# EAGLE board PCB_5.0___2024_v51 (EAGLE 9.7.0)
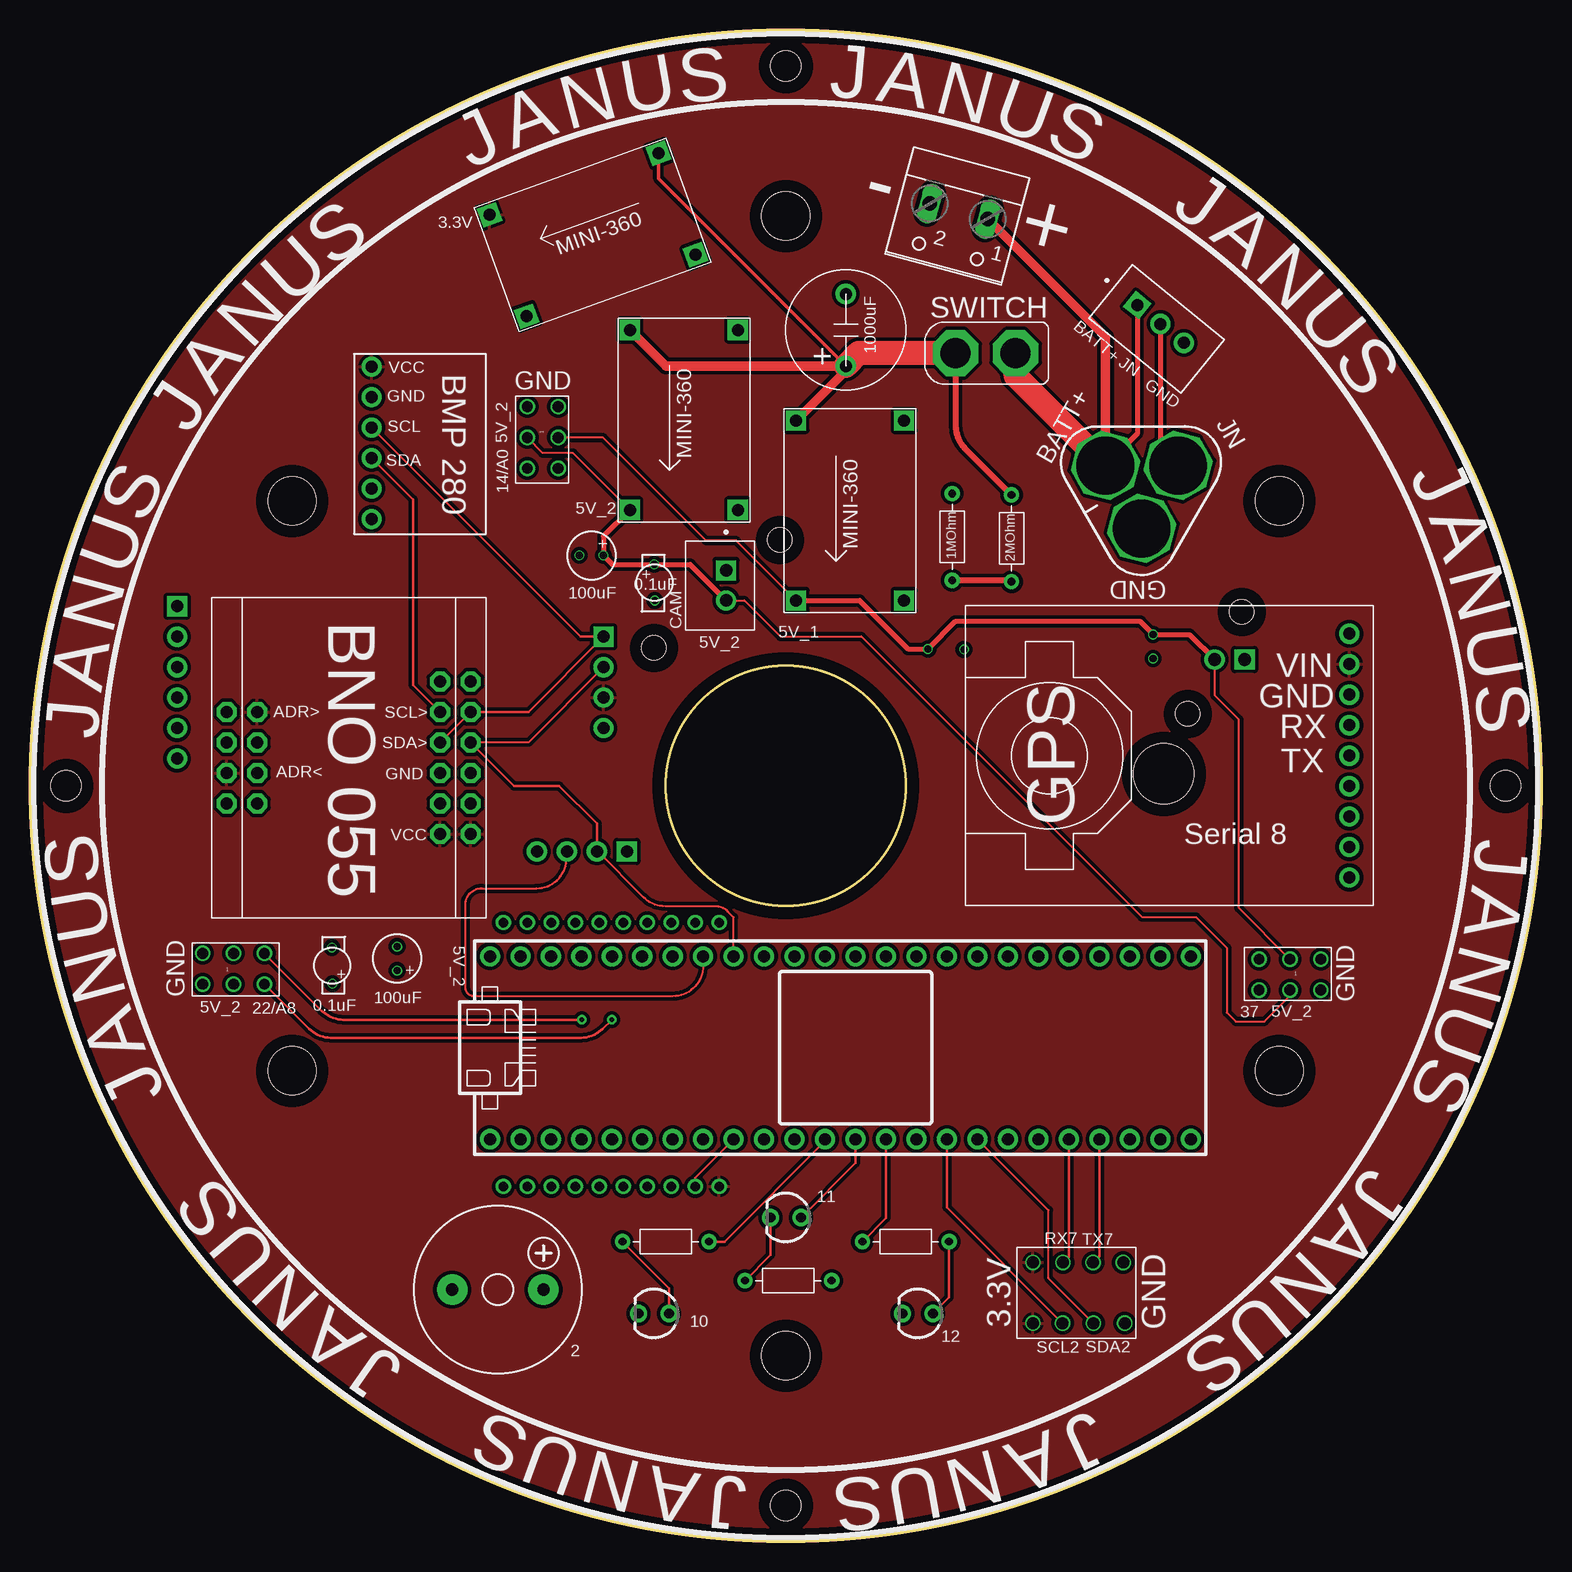
[diagram p0: board, top side]
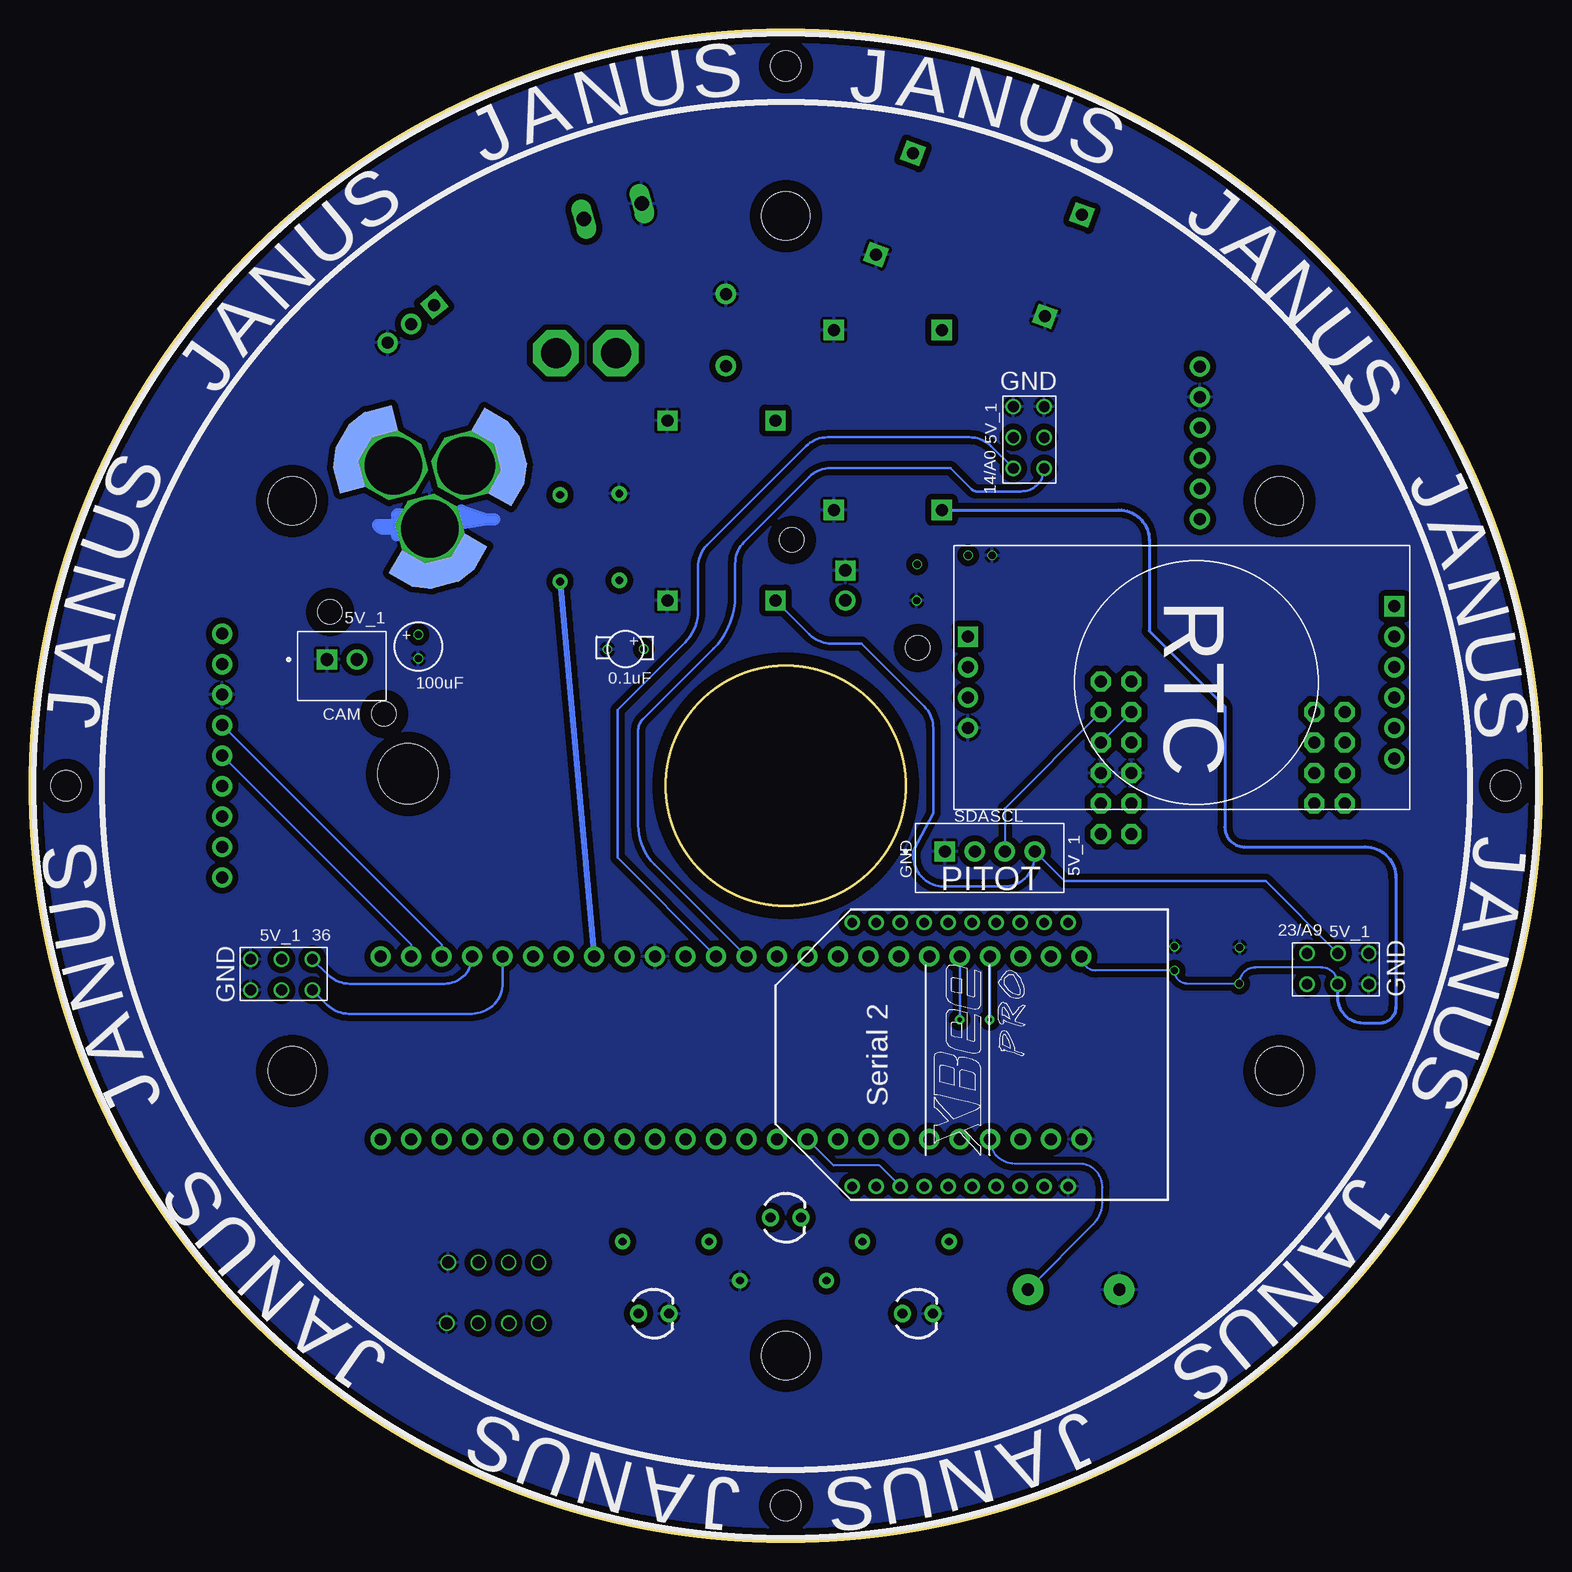
[diagram p1: board, bottom side, seen from below]

Size 126 x 126 mm. Coordinates in mm from the lower left corner, seen from the top.
Outline: circle at 63,63 radius 63
Outline: circle at 63,63 radius 10
Copper layers (1*16): Top 0.035mm / dielectric 1.5mm / Bottom 0.035mm
Design rules "default *": minimum track width 0.15mm, minimum drill 0.35mm, track to track 0.15mm, track to pad 0.15mm, pad to pad 0.15mm, via to via 0.15mm, smd to smd 0.15mm, copper to edge 1mm, drill to drill 0.2mm, minimum pad ring 0.1mm, minimum via ring 8mil, stop-mask expansion 0mil, vias tented up to drill 0mil, thermal gap 10mil
Holes 2.5 mm at 123,63 63,3 3,63 63,123
Holes 4 mm at 104.14,86.75 21.86,39.25 104.14,39.25 21.86,86.75 63,110.5 63,15.5
Holes 2 mm at 101,77.5 96.5,69 62.5,83.5 52,74.5

## Footprints (pad centres in the part's own frame; a part is rotated, then mirrored left to right if it is on the bottom)
JST_B3B-XH-A(LF)(SN) = drill 1 pad 1.676 square: 1 2.5,-0.525 | drill 1 pad 1.676: 2 0,-0.525; 3 -2.5,-0.525
MT-60 = drill 4.8 pad 5.4 octagon: + -3.031,-1.75; - 3.031,-1.75; CM 0,3.5 | smd 2.23 x 2.23 bottom: P$1 6.832,-1.763; P$2 3.032,-5.533; P$6 -3.077,-5.577; P$7 -6.847,-1.778; P$13 -0.024,7.288 | smd 2.23 x 2.23 rotated 45 bottom: P$3 5.702,-4.42 | smd 1.7 x 2.5 rotated 22.5 bottom: P$4 4.441,-5.178 | smd 1.7 x 2.5 rotated 67.5 bottom: P$5 6.469,-3.169 | smd 2.23 x 2.23 rotated 315 bottom: P$8 -5.734,-4.447 | smd 1.7 x 2.5 rotated 292.5 bottom: P$9 -6.492,-3.187 | smd 1.7 x 2.5 rotated 337.5 bottom: P$10 -4.483,-5.215 | smd 2.23 x 2.23 rotated 135 bottom: P$11 -2.691,6.147; P$12 2.651,6.188 | smd 1.7 x 2.5 rotated 157.5 bottom: P$14 1.403,6.933 | smd 1.7 x 2.5 rotated 202.5 bottom: P$15 -1.451,6.946
LED_3MM = drill 0.813 pad 1.422: A -1.27,0; K 1.27,0
JST_B2B-XH-A(LF)(SN) = drill 1.05 pad 1.676 square: 1 1.25,-0.525 | drill 1.05 pad 1.676: 2 -1.25,-0.525
TEENSY4.1 = drill 1 pad 1.676: 0/RX -26.67,-7.62; 1/TX -24.13,-7.62; 2 -21.59,-7.62; 3 -19.05,-7.62; 3V3 6.35,-7.62; 3V3_LO -24.13,7.62; 4 -16.51,-7.62; 5 -13.97,-7.62; 6 -11.43,-7.62; 7 -8.89,-7.62; 8 -6.35,-7.62; 9 -3.81,-7.62; 10/CS -1.27,-7.62; 11/MOSI 1.27,-7.62; 12/MISO 3.81,-7.62; 13/SCK 3.81,7.62; 14/A0 1.27,7.62; 15/A1 -1.27,7.62; 16/A2 -3.81,7.62; 17/A3 -6.35,7.62; 18/A4/SDA -8.89,7.62; 19/A5/SCL -11.43,7.62; 20/A6 -13.97,7.62; 21/A7 -16.51,7.62; 22/A8 -19.05,7.62; 23/A9 -21.59,7.62; 24 8.89,-7.62; 25 11.43,-7.62; 26 13.97,-7.62; 27 16.51,-7.62; 28 19.05,-7.62; 29 21.59,-7.62; 30 24.13,-7.62; 31/A12 26.67,-7.62; 32 29.21,-7.62; 33 29.21,7.62; 34 26.67,7.62; 35 24.13,7.62; 36 21.59,7.62; 37 19.05,7.62; 38 16.51,7.62; 39 13.97,7.62; 40 11.43,7.62; 41 8.89,7.62; AGND -26.67,7.62; GND -29.21,-7.62; GND1 6.35,7.62; VIN -29.21,7.62
JST_B4B-XH-A(LF)(SN) = drill 1 pad 1.676 square: 1 3.75,-0.525 | drill 1 pad 1.676: 2 1.25,-0.525; 3 -1.25,-0.525; 4 -3.75,-0.525
RESAD724W46L381D178B = drill 0.66 pad 1.26: 1 -3.62,0; 2 3.62,0
F/CM12P = drill 1.016 pad 2.54: + 3.81,0; - -3.81,0
XT-30U = drill 2.5 pad 3.81 octagon: + 2.13,2.6; - 7.13,2.6
1000UF = drill 1 pad 1.676: + -3,0; - 3,0
ADAFRUIT_ULTIMATE_GPS = drill 1 pad 1.7: 3.3V 2.019,22.646; EN 2.019,20.106; FIX 2.019,15.026; GND 2.019,7.406; PPS 2.019,2.326; RX 2.019,9.946; TX 2.019,12.486; VBAT 2.019,17.566; VIN 2.019,4.866 | hole 5: 17.5,14
VARY_BUCK = drill 1 pad 1.676 square: IN+ 1,1; IN- 1,10; OUT+ 16,1; OUT- 16,10
BNO055_SELF = drill 1 pad 1.676: CSB 3.779,9.526; GND 11.399,9.526; SCL 8.859,9.526; SD0 1.239,9.526; SDA 6.319,9.526; VCC 13.939,9.526
DS3231_RTC = drill 1 pad 1.676: P$1 1.195,11.879; P$2 1.195,9.339; P$3 1.195,6.799; P$5 36.755,9.339; P$6 36.755,6.799; P$7 36.755,4.259; P$8 36.755,11.879; P$9 36.755,14.419 | drill 1 pad 1.676 square: P$4 1.195,14.419; P$10 36.755,16.959
BNO055 = drill 1 pad 1.676 octagon: 3V 9.525,1.27; 3V1 9.525,3.81; ADR 17.145,19.05; ADR2 12.065,21.59; GND 12.065,1.27; GND1 12.065,3.81; INT 14.605,19.05; INT1 9.525,21.59; PS0 9.525,19.05; PS1 12.065,19.05; PS02 14.605,21.59; PS12 17.145,21.59; RST 19.685,1.27; RST2 19.685,3.81; SCL 17.145,1.27; SCL2 14.605,3.81; SDA 14.605,1.27; SDA2 17.145,3.81; VIN 6.985,1.27; VIN1 6.985,3.81
100UF_ELECTROLYTIC = drill 0.6: + -1,0; - 1,0
0.1UF_CERAMIC = drill 0.6: + 0,0; - 3.013,0.039
W237-102 = drill 1.194 pad 1.676 long: 1 -2.5,-1.27; 2 2.5,-1.27
332-06 = drill 0.9 pad 1.27: 1 0.54,1.032; 2 0.54,-1.54; 3 -2.032,1.032; 4 -2.032,-1.54; 5 -4.604,1.032; 6 -4.604,-1.54
332-08 = drill 1 pad 1.27: 1 -4.397,-3.794; 2 -4.397,1.254; 3 0.651,-3.794; 4 -1.889,1.254; 5 -1.921,-3.794; 6 0.619,1.254; 7 3.254,-3.794; 8 3.127,1.254
XBEE-PRO = drill 0.8 pad 1.27: 1 -11,9; 2 -11,7; 3 -11,5; 4 -11,3; 5 -11,1; 6 -11,-1; 7 -11,-3; 8 -11,-5; 9 -11,-7; 10 -11,-9; 11 11,-9; 12 11,-7; 13 11,-5; 14 11,-3; 15 11,-1; 16 11,1; 17 11,3; 18 11,5; 19 11,7; 20 11,9

## Placement (x,y rotation side)
BATT_BALANCE_JST  B3B-XH-A(LF)(SN)  [JST_B3B-XH-A(LF)(SN)]  93.91,101.09 140.9 top
BATT_CONNECTOR  MT60_MALE  [MT-60]  92.68,87.94 300 top
D1  [LED_3MM]  63,27 180 top
D2  [LED_3MM]  52,19 180 top
D3  [LED_3MM]  74,19 180 top
J2  B2B-XH-A(LF)(SN)  [JST_B2B-XH-A(LF)(SN)]  100,73 180 bottom
J3  B2B-XH-A(LF)(SN)  [JST_B2B-XH-A(LF)(SN)]  57.5,79.7 90 top
M1  TEENSY4.1  [TEENSY4.1]  67.55,41.16 0 top
PITOT  B4B-XH-A(LF)(SN)  [JST_B4B-XH-A(LF)(SN)]  46,57 180 bottom
R1  [RESAD724W46L381D178B]  81.82,83.63 270 top
R2  [RESAD724W46L381D178B]  76.88,83.75 90 top
R3  [RESAD724W46L381D178B]  63.21,21.75 180 top
R4  [RESAD724W46L381D178B]  53,25 180 top
R5  [RESAD724W46L381D178B]  73,25 0 top
SG1  F/CM12P  [F/CM12P]  39,21 0 top
SWITCH  XT-30U  [XT-30U]  84.29,101.66 180 top
U$1  1000UF1000UF  [1000UF]  68,101 90 top
U$2  ULTIMATE_GPS  [ADAFRUIT_ULTIMATE_GPS]  112,78 180 top
U$3  VARY_BUCKMINI-360  [VARY_BUCK]  62.86,94.45 270 top
U$4  VARY_BUCKMINI-360  [VARY_BUCK]  49,102 270 top
U$5  VARY_BUCKMINI-360  [VARY_BUCK]  53,117 200 top
U$6  BMP_280THTOUGHHOLE  [BNO055_SELF]  38,84 90 top
U$7  DS3231_RTC  [DS3231_RTC]  49.01,61 0 bottom
U$8  BNO055  [BNO055]  38,52 90 top
U$9  100UF-ELECTROLYTIC  [100UF_ELECTROLYTIC]  93.63,74.6 270 bottom
U$10  100UF-ELECTROLYTIC  [100UF_ELECTROLYTIC]  30.6,48.6 90 top
U$11  100UF-ELECTROLYTIC  [100UF_ELECTROLYTIC]  46.8,82.2 180 top
U$12  0.1UF_CERAMIC  [0.1UF_CERAMIC]  25.2,46.5 90 top
U$13  0.1UF_CERAMIC  [0.1UF_CERAMIC]  52.05,81.45 270 top
U$14  0.1UF_CERAMIC  [0.1UF_CERAMIC]  74.85,74.4 180 bottom
X1  [W237-102]  77.09,109.66 165 top
X2  332-06  [332-06]  19,48 0 top
X3  332-06  [332-06]  43,90 270 top
X4  332-06  [332-06]  103,47 180 top
X5  332-08  [332-08]  88,22 0 top
XB1  XBEE-PRO  [XBEE-PRO]  48.45,40.6 90 bottom

## Library data of the parts
BATT_BALANCE_JST = JST_3Pin; AVAILABILITY: In Stock; CHECK_PRICES: https://www.snapeda.com/parts/B3B-XH-A(LF)(SN)/JST+Sales+America+Inc./view-part/?ref=eda; DESCRIPTION: Connector Header Through Hole 3 position 0.098 (2.50mm); MF: JST Sales; MP: B3B-XH-A(LF)(SN); PACKAGE: None; PRICE: None; SNAPEDA_LINK: https://www.snapeda.com/parts/B3B-XH-A(LF)(SN)/JST+Sales+America+Inc./view-part/?ref=snap
BATT_CONNECTOR = MT-60
D1-D3 = LED; PROD_ID: DIO-08794
J2 J3 = JST_2Pin; AVAILABILITY: In Stock; CHECK_PRICES: https://www.snapeda.com/parts/B2B-XH-A(LF)(SN)/JST+Sales+America+Inc./view-part/?ref=eda; DESCRIPTION: Connector Header Through Hole 2 position 0.098 (2.50mm); MF: JST Sales; MP: B2B-XH-A(LF)(SN); PACKAGE: None; PRICE: None; SNAPEDA_LINK: https://www.snapeda.com/parts/B2B-XH-A(LF)(SN)/JST+Sales+America+Inc./view-part/?ref=snap
M1 = Teensy4.1_Main_Pins
PITOT = JST_4Pin; CHECK_PRICES: https://www.snapeda.com/parts/B4B-XH-A(LF)(SN)/JST+Sales+America+Inc./view-part/?ref=eda; DESCRIPTION: Connector Header Through Hole 4 position 0.098 (2.50mm); MF: JST Sales; MP: B4B-XH-A(LF)(SN); PACKAGE: None; SNAPEDA_LINK: https://www.snapeda.com/parts/B4B-XH-A(LF)(SN)/JST+Sales+America+Inc./view-part/?ref=snap
R1-R5 = Resistor; CATEGORY: Resistor; SUB-CATEGORY: Fixed
SG1 = buzzer_roundHole; OC_FARNELL: unknown; OC_NEWARK: unknown
SWITCH = XT-30U_M
U$1 = 1000uF
U$2 = Adafruit_Ultimate_GPS
U$3-U$5 = MINI-360
U$6 = BMP280
U$7 = RTC_DS3231
U$8 = Library
U$9-U$11 = 100uF
U$12-U$14 = 0.1uF
X1 = ScrewTerminal; MPN: 237-102; OC_FARNELL: unknown; OC_NEWARK: 70K9898
X2-X5 = 6pinConnector
XB1 = Xbee; MPN: XBP24-AWI-001; OC_FARNELL: 1337916; OC_NEWARK: 42M2667

## Nets
3.3V: U$2.VIN U$5.OUT+ U$6.VCC U$7.P$2 U$8.ADR U$8.ADR2 U$8.VIN U$8.VIN1 X5.1 X5.2 XB1.1
5V_1: J2.2 PITOT.4 U$3.OUT+ U$9.+ U$14.+ X2.3 X3.3 X4.4
5V_2: J3.2 M1.VIN U$4.OUT+ U$10.+ U$11.+ U$12.+ U$13.+ X2.4 X3.4 X4.3
BATT+: BATT_BALANCE_JST.1 BATT_CONNECTOR.+ SWITCH.+ X1.1
BATT_ANALOG: M1.40 R1.2 R2.1
BATT_COMM: BATT_BALANCE_JST.2 BATT_CONNECTOR.CM
BATT_S: R1.1 SWITCH.- U$1.+ U$3.IN+ U$4.IN+ U$5.IN+
BUZZ: M1.2 SG1.+
GND: BATT_BALANCE_JST.3 BATT_CONNECTOR.- D2.K D3.K J2.1 J3.1 M1.GND M1.GND1 PITOT.1 R2.2 R3.1 SG1.- U$1.- U$2.GND U$3.IN- U$3.OUT- U$4.IN- U$4.OUT- U$5.IN- U$5.OUT- U$6.GND U$7.P$3 U$8.GND U$8.GND1 U$9.- U$10.- U$11.- U$12.- U$13.- U$14.- X1.2 X2.5 X2.6 X3.5 X3.6 X4.5 X4.6 X5.7 X5.8 XB1.10
LED1: D1.A M1.11/MOSI
LED2: M1.10/CS R4.1
LED3: M1.12/MISO R5.1
N$1: D1.K R3.2
N$2: D2.A R4.2
N$3: D3.A R5.2
RX_EXT: M1.28 X5.4
RX_GPS_8: M1.35 U$2.RX
RX_XB_2: M1.8 XB1.3
SCL: M1.19/A5/SCL PITOT.3 U$6.SCL U$7.P$4 U$8.SCL U$8.SCL2
SCL2: M1.24 X5.5
SDA: M1.18/A4/SDA PITOT.2 U$6.SDA U$7.P$1 U$8.SDA U$8.SDA2
SDA2: M1.25 X5.3
SEV1: M1.23/A9 X2.1
SEV2: M1.22/A8 X2.2
SEV3: M1.14/A0 X3.1
SEV4: M1.15/A1 X3.2
SEV5: M1.37 X4.1
SEV6: M1.36 X4.2
TX_EXT: M1.29 X5.6
TX_GPS_8: M1.34 U$2.TX
TX_XB_2: M1.7 XB1.2

## Tracks (layer width: path | path; a pad name or v marks a point on that pad's centre or on a via)
3.3V
  pour Top (isolate 0.3): -26.92,-26.92 152.93,-26.92 152.93,152.93 -26.92,152.93
5V_1
  Top 0.18: U$3.OUT+ 58.86,83.45 56.35,83.45 47.77,92.03 X3.3 | X4.4 100.75,52.82 100.75,68.53 98.75,70.53 98.75,73.5 J2.2
  Top 0.43: U$3.OUT+ 69.15,78.45 73.2,74.4 U$14.+ 77.12,76.67 92.56,76.67 U$9.+ 96.65,75.6 98.75,73.5
  Bottom 0.2: U$3.OUT+ 61,75.59 arc-45 59.21,74.85 56.7,74.85 51.44,69.59 arc45 50.7,67.8 50.7,60.75 52.35,57.6 52.35,57.14 arc-90 49.81,54.6 44.79,54.6 arc-90 42.25,57.14 PITOT.4 39.77,55.05 22.99,55.05 X2.3
5V_2
  Top 0.18: U$4.OUT+ 45.25,90.75 42.74,90.75 X3.4 | X4.3 105.03,45.48 102.9,43.35 100.5,43.35 99.75,44.1 99.75,49.5 97.2,52.05 92.7,52.05 69.3,75.45 62.55,75.45 59.55,78.45 J3.2
  Top 0.43: U$4.OUT+ 47.8,83.8 U$11.+ 48.55,81.45 U$13.+ 55.02,81.45 J3.2
  Bottom 0.15: X2.4 arc-90 18.36,47.85 23.85,47.85 arc-90 U$12.+ 29.5,46.5 arc90 U$10.+ 37.16,47.6 arc90 M1.VIN
  Bottom 0.24: U$4.OUT+ 35.24,86 arc90 32.7,83.46 32.7,75.9 26.4,69.6 26.4,59.55 arc-90 24.75,57.9 14.69,57.9 arc90 12.15,55.36 12.15,44.55 arc90 13.5,43.2 14.85,43.2 arc90 16.97,45.32 X2.4
BATT+
  Top 0.15: 89.73,89.77 BATT_CONNECTOR.+
  Top 0.4: BATT_BALANCE_JST.1 92.3,92.34 89.73,89.77
  Top 0.8: X1.1 89.65,100.42 BATT_CONNECTOR.+
  Top 2: BATT_CONNECTOR.+ 82.16,97.17 SWITCH.+
BATT_ANALOG
  Top 0.2: 81.7,80.13 R1.2
  Top 0.5: R2.1 81.7,80.13
  Bottom 0.15: 77.21,80.13 R2.1
  Bottom 0.5: R1.2 M1.40
BATT_COMM
  Top 0.4: BATT_BALANCE_JST.2 94.24,91.16 BATT_CONNECTOR.CM
BATT_S
  Top 0.3: U$1.+ 52.4,113.6 U$5.IN+
  Top 0.508: SWITCH.- 77.16,92.96 arc45 77.91,91.16 R1.1
  Top 0.8: U$3.IN+ 68,97.59 U$1.+ 53,98 U$4.IN+
  Top 2: SWITCH.- 69.06,99.06 U$1.+
BUZZ
  Bottom 0.15: SG1.+ 37.34,26.47 arc-45 36.6,28.26 36.6,29.55 arc-90 38.55,31.5 43.92,31.5 arc90 M1.2
GND
  Bottom 1.016: BATT_CONNECTOR.- 92.98,84.74 97.02,84.74 96.72,84.44 BATT_CONNECTOR.- | BATT_CONNECTOR.- 91.91,85.21 88.21,85.21 87.93,85.21 | 87.93,85.21 87.28,85.21 | BATT_CONNECTOR.- 93.84,85.6 95.36,85.6 95.4,85.56 95.4,83.89 | BATT_CONNECTOR.- 91.53,84.44 90.03,85.94 | 90.03,85.94 90.03,85.23 | 90.03,85.94 87.93,85.21 | BATT_CONNECTOR.- 87.93,85.21
  pour Bottom (isolate 0.5): -36.92,-36.92 162.93,-36.92 162.93,162.93 -36.92,162.93
LED1
  Top 0.2: D1.A 68.82,31.55 M1.11/MOSI
LED2
  Top 0.15: 66.28,33.39 M1.10/CS
  Top 0.2: R4.1 57.88,25 66.28,33.39
LED3
  Top 0.2: R5.1 71.36,26.98 M1.12/MISO
N$1
  Top 0.2: R3.2 61.73,23.89 D1.K
N$2
  Top 0.2: D2.A 53.27,21.11 R4.2
N$3
  Top 0.2: D3.A 76.62,20.35 R5.2
RX_EXT
  Top 0.2: M1.28 86.6,23.74 X5.4
RX_GPS_8
  Bottom 0.15: U$2.RX 91.68,49.75 M1.35
RX_XB_2
  Bottom 0.15: XB1.3 55.2,31.35 59,31.35 59.01,31.35 M1.8
SCL
  Top 0.15: U$8.SCL U$8.SCL2 | M1.19/A5/SCL 56.12,47.99 arc-90 53.58,45.45 37.05,45.45 arc-90 36.3,46.2 36.3,53.1 arc-90 37.65,54.45 42.21,54.45 arc90 44.75,56.99 PITOT.3
  Top 0.2: U$8.SCL 41.55,69.14 U$7.P$4 45.91,75.42 U$6.SCL
  Bottom 0.15: U$8.SCL 44.75,61.12 PITOT.3
SCL2
  Top 0.2: X5.5 76.44,27.84 M1.24
SDA
  Top 0.15: U$7.P$1 41.55,66.61 U$8.SDA | PITOT.2 47.25,57.6 51.16,53.69 arc45 52.95,52.95 57.11,52.95 arc-45 58.2,52.5 58.66,52.04 M1.18/A4/SDA
  Top 0.2: U$8.SDA 40.34,63 44.1,63 47.25,59.85 47.25,57.6 | U$6.SDA 31.95,86.84 31.95,71.39 U$8.SDA2
  Bottom 0.15: U$8.SDA U$8.SDA2
SDA2
  Top 0.15: X5.3 84.91,21.95 84.91,27.61 M1.25
SEV1  (via drill 0.35 pad 0.5)
  Top 0.2: X2.1 24.33,44.24 arc45 26.12,43.5 v46,43.5
  Bottom 0.2: M1.23/A9 arc-45 46,48.68 v46,43.5
SEV2  (via drill 0.35 pad 0.5)
  Top 0.2: X2.2 23.26,42.74 arc45 25.05,42 45.95,42 arc45 47.74,42.74 v48.5,43.5
  Bottom 0.2: M1.22/A8 v48.5,43.5
SEV3
  Bottom 0.2: X3.1 45.88,91.3 arc-45 47.67,92.05 59.51,92.05 arc-45 61.31,91.3 69.56,83.05 arc-45 70.31,81.25 70.31,77.59 arc45 71.41,74.93 77.03,69.3 77.03,57 M1.14/A0
SEV4
  Bottom 0.2: X3.2 arc90 43.39,87.53 47.05,87.53 arc45 47.53,87.73 49.27,89.48 59.26,89.48 arc-45 61.06,88.73 66.47,83.32 arc-45 67.22,81.52 67.22,78.79 arc45 69.02,74.43 74.89,68.56 arc-45 75.3,67.57 75.3,59.73 arc-45 73.94,56.44 M1.15/A1
SEV5
  Bottom 0.2: X4.1 101.24,44.74 arc-45 99.44,44 89.14,44 arc-90 86.6,46.54 M1.37
SEV6
  Bottom 0.2: X4.2 101.16,47.24 arc-45 99.37,46.5 91.42,46.5 arc-90 M1.36
TX_EXT
  Top 0.2: M1.29 89.14,23.77 X5.6
TX_GPS_8
  Bottom 0.15: U$2.TX 94.22,49.75 M1.34
TX_XB_2
  Top 0.15: XB1.2 55.45,30.33 M1.7

## Text on the board
tPlace: S | J | A | U | N | N | U | A | S | J | - | J | A | 3.3V | + | S | N | U | SWITCH | U | BATT+ | N | S | JN | VCC | BMP 280 | GND | GND | A | GND | JN | J | SCL | 5V_2 | SDA | BATT+ | J | 14/A0 | S | A | 5V_2 | 1MOhm | 2MOhm | N | U | GND | 100uF | 0.1uF | BNO 055 | N | CAM | U | 5V_1 | 5V_2 | VIN | A | S | GND | ADR> | SCL> | J | RX | SDA> | ADR< | GND | TX | GPS | J | VCC | Serial 8 | S | A | U | 5V_2 | GND | N | N | GND | 100uF | U | 5V_2 | 22/A8 | 0.1uF | 37 | 5V_2 | A | S | J | J | 11 | A | S | RX7 | TX7 | N | U | U | N | 10 | 3.3V | GND | S | A | 12 | SCL2 | SDA2 | J | 2 | J | S | A | U | N | N | A | S | U | J
bPlace: A | J | S | N | U | U | N | S | A | J | J | S | A | U | N | N | U | A | S | GND | 5V_1 | J | 14/A0 | J | A | S | U | N | RTC | N | U | 0.1uF | A | S | 100uF | CAM | J | SCL | SDA | J | GND | A | 5V_1 | 5V_1 | PITOT | S | 5V_1 | 23/A9 | 5V_1 | N | 36 | GND | U | U | GND | Serial 2 | N | S | A | J | J | A | S | U | N | N | U | A | S | J | J | A | S | N | U | U | S | A | N | J
bNames: 5V_1